# Altium PCB Board.PcbDoc
Units mil, origin at the board's own origin, x right, y up, seen from the top; angles counter-clockwise.
Board outline 6000 x 4000 mil, 2 copper layers (Top Layer, Bottom Layer); 40 components, 18 nets, 177 pads, 0 vias.
Unrouted connection lines stored in the file: 88.
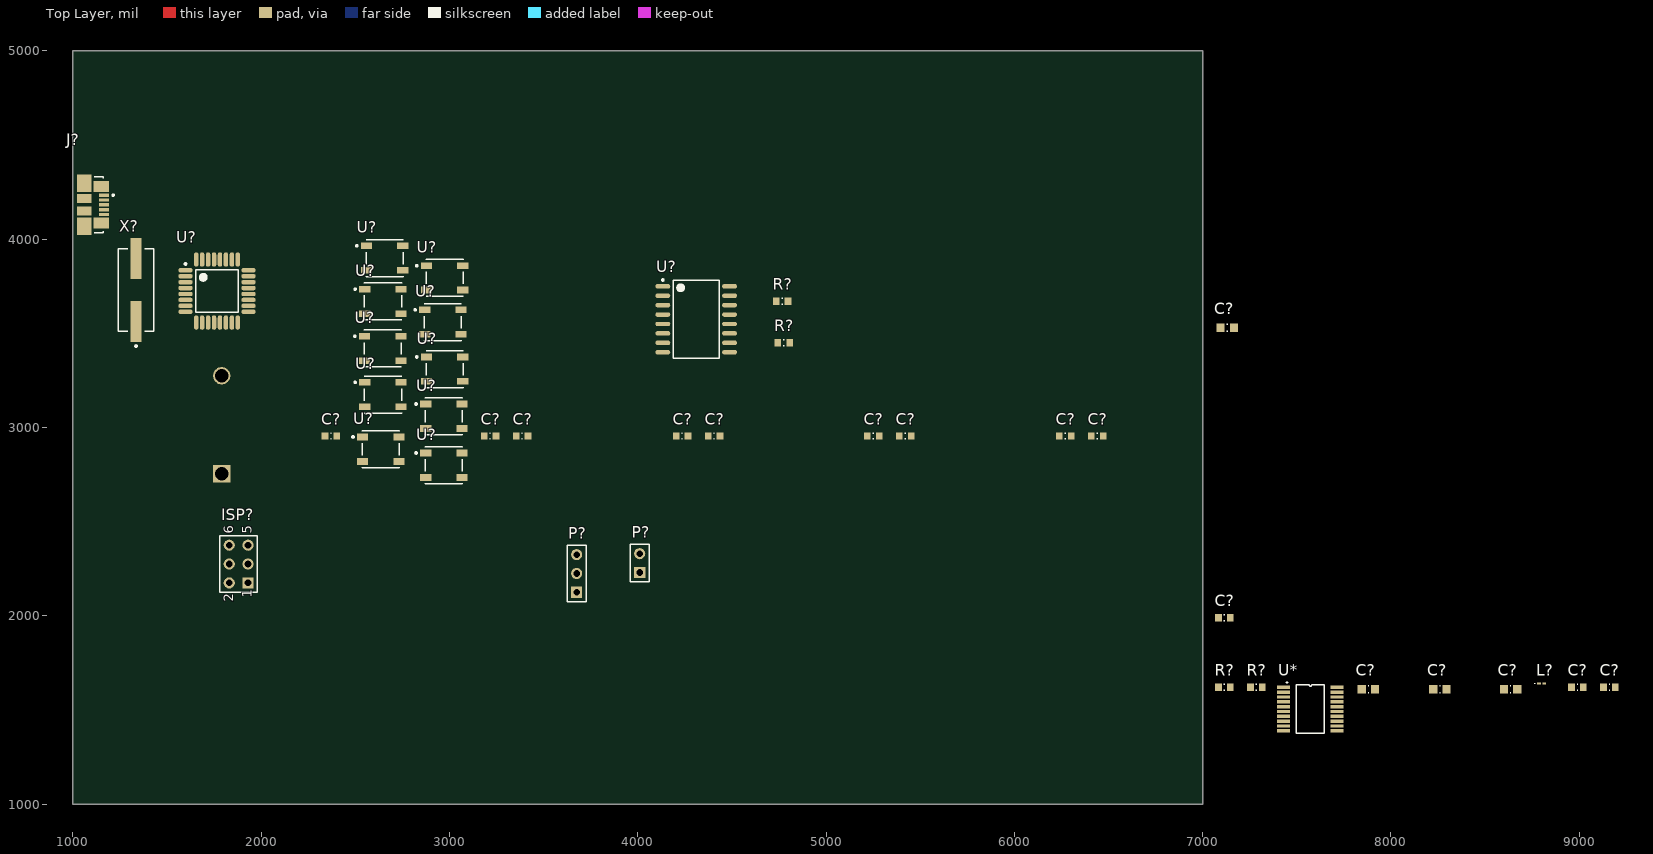
[diagram p0: Top Layer view]
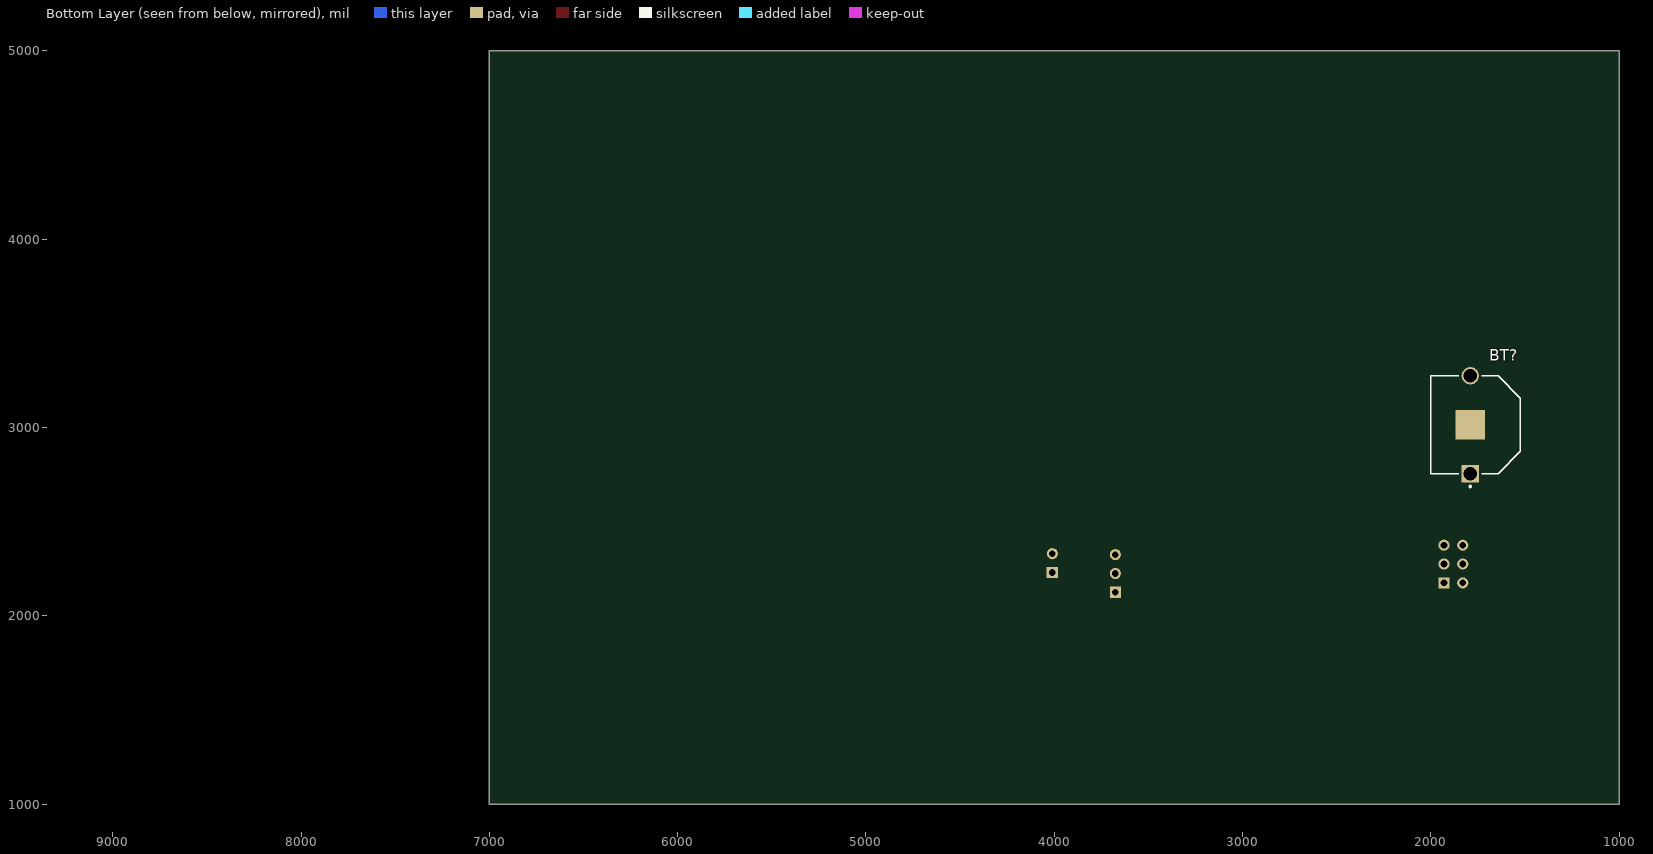
[diagram p1: Bottom Layer view, seen from below]

## Layer stack, top to bottom
Top Solder: solder mask 0.4, Solder Resist, Dk 3.5
Top Layer: signal copper 1.4
Dielectric 1: dielectric 12.6, FR-4, Dk 4.8
Bottom Layer: signal copper 1.4
Bottom Solder: solder mask 0.4, Solder Resist, Dk 3.5

## Board outline
1000,1000 7000,1000 7000,5000 1000,5000

## Design rules (kind name [scope] priority, off if disabled: settings)
Clearance [All] p1: gap=10 ignorepadtopadclearanceinfootprint=FALSE except(0: Arc-Hole Track-Hole SMDPad-Hole THPad-Hole Via-Hole Fill-Hole Poly-Hole Region-Hole Text-Hole)
PolygonConnect [All] p1: connectstyle=Relief reliefconductorwidth=10 reliefentries=4 polygonreliefangle="90 Angle" airgapwidth=10
RoomDefinition USB [InComponentClass('USB')] p1: confinementstyle=ConfineIn formatcopy=TRUE lockcomponents=FALSE outline 0,0 2000,0 2000,1000 0,1000
RoomDefinition RTC [InComponentClass('RTC')] p2: confinementstyle=ConfineIn formatcopy=TRUE lockcomponents=FALSE outline 7045,1060 7545,1060 7545,1825 7045,1825
RoomDefinition LEDs [InComponentClass('LEDs')] p3: confinementstyle=ConfineIn formatcopy=TRUE lockcomponents=FALSE outline 0,0 2000,0 2000,1000 0,1000
RoomDefinition Control [InComponentClass('Control')] p4: confinementstyle=ConfineIn formatcopy=TRUE lockcomponents=FALSE outline 0,0 2000,0 2000,1000 0,1000
RoutingVias [All] p1: holewidth=28 width=50 viastyle="Through Hole" minholewidth=28 minwidth=50 maxholewidth=28 maxwidth=50
SolderMaskExpansion [All] p1: expansion=4
Width [All] p1: maxlimit=10 minlimit=10 preferedwidth=10
30 further rules are at their usual default settings.

## Classes and differential pairs
component class USB: J?
component class RTC: C? R? U?
component class LEDs: C? U?
component class Control: C? ISP? L? P? R? U* U? X?

## Components (designator, comment, footprint, x,y, rotation, side; value= is the part's Value field where it differs from the comment)
BT? "3001" KSTN-3001_V 1790,3015 r90 bottom
C? "CAP 100nF" CAPC0603(1608)100_M 7880,1610 r0 top value=100nF
C? "CAP 22pF 16V" CAPC0603(1608)100_N 9160,1620 r0 top value=22pF
C? "100nF" CAPC0603(1608)100_M 8260,1610 r0 top
C? "100nF" CAPC0603(1608)100_M 8635,1610 r0 top
C? "CAP 22pF 16V" CAPC0603(1608)100_N 8990,1620 r0 top value=22pF
C? "100nF 16V" CAPC0603(1608)100_N 5250,2955 r0 top value=100nF
C? "100nF 16V" CAPC0603(1608)100_N 3215,2955 r0 top value=100nF
C? "100nF 16V" CAPC0603(1608)100_N 4235,2955 r0 top value=100nF
C? "100nF 16V" CAPC0603(1608)100_N 6270,2955 r0 top value=100nF
C? "100nF 16V" CAPC0603(1608)100_N 6440,2955 r0 top value=100nF
C? "100nF 16V" CAPC0603(1608)100_N 3385,2955 r0 top value=100nF
C? "100nF 16V" CAPC0603(1608)100_N 7115,1990 r0 top value=100nF
C? "100nF 16V" CAPC0603(1608)100_N 4405,2955 r0 top value=100nF
C? "100nF 16V" CAPC0603(1608)100_N 2370,2955 r0 top value=100nF
C? "100nF 16V" CAPC0603(1608)100_N 5420,2955 r0 top value=100nF
C? "100nF" CAPC0603(1608)100_M 7130,3530 r0 top
ISP? "Header 3X2" HDR2X3 1930,2175 r90 top
J? "47346-0001" MOLX-47346-0001-5_V 1067.87,4182.97 r270 top
L? "Inductor" 0603 8800,1640 r0 top value=10µH
P? "Header 3" HDR1X3 3675,2125 r90 top
P? "UARTCON" HDR1X2 4010,2230 r90 top
R? "4K7 5% 0603(1608)" RESC0603(1608)_N 7285,1620 r0 top value="4700.00 Ohm"
R? "4K7 5% 0603(1608)" RESC0603(1608)_N 7115,1620 r0 top value="4700.00 Ohm"
R? "4K7" RESC0603(1608)_N 4766.5,3670 r0 top value="4700.00 Ohm"
R? "4K7" RESC0603(1608)_N 4775,3450 r0 top value="4700.00 Ohm"
U* "MTCH108" "MTCH-108 SSOP" 7430,1620 r0 top
U? "ATmega328P-AU" 32A_M 1765,3725 r0 top
U? "1655" ADA-RGB-1655_V 2970,2800 r0 top
U? "1655" ADA-RGB-1655_V 2635,2885 r0 top
U? "1655" ADA-RGB-1655_V 2965,3560 r0 top
U? "1655" ADA-RGB-1655_V 2973.54,3795.04 r0 top
U? "1655" ADA-RGB-1655_V 2646.46,3175.04 r0 top
U? "1655" ADA-RGB-1655_V 2970,3060.04 r0 top
U? "1655" ADA-RGB-1655_V 2646.46,3669.96 r0 top
U? "1655" ADA-RGB-1655_V 2645,3420 r0 top
U? "1655" ADA-RGB-1655_V 2655,3900 r0 top
U? "1655" ADA-RGB-1655_V 2973.54,3310.04 r0 top
U? "DS3231SN" W16-H2_L 4310,3575 r0 top
X? "ATS16ASM-1" CTS-ATS-SM-XTAL-2 1335,3730 r90 top

## Footprints (in the part's own frame and the unit in brackets; to place one, negate y for a bottom-side part, rotate by r counter-clockwise, add the part's x,y. Pads: shape width x height; smd on the part's side, far side on the other; paste and mask are expansions set on the pad)
32A_M [mm] "Thin QFP, 32-Leads, Body 7x7mm, Pitch 0.8mm, IPC Low Density"
  oval 1.95x0.6 smd: 1(-4.25,2.8) 2(-4.25,2) 3(-4.25,1.2) 4(-4.25,0.4) 5(-4.25,-0.4) 6(-4.25,-1.2) 7(-4.25,-2) 8(-4.25,-2.8) 17(4.25,-2.8) 18(4.25,-2) 19(4.25,-1.2) 20(4.25,-0.4) 21(4.25,0.4) 22(4.25,1.2) 23(4.25,2) 24(4.25,2.8)
  oval 0.6x1.95 smd: 9(-2.8,-4.25) 10(-2,-4.25) 11(-1.2,-4.25) 12(-0.4,-4.25) 13(0.4,-4.25) 14(1.2,-4.25) 15(2,-4.25) 16(2.8,-4.25) 25(2.8,4.25) 26(2,4.25) 27(1.2,4.25) 28(0.4,4.25) 29(-0.4,4.25) 30(-1.2,4.25) 31(-2,4.25) 32(-2.8,4.25)
  silkscreen extent -4.37,-2.85 2.85,3.77, body extent -3.5,-3.5 3.5,3.5, height 1.2
0603 [mm] "Chip Inductor, Body 0.6x0.3mm, IPC High Density"
  rect 0.5x0.3 smd: 1(-0.35,0) 2(0.35,0)
  silkscreen extent -0.9,-0.05 -0.9,0.05, body extent -0.33,-0.18 0.33,0.18, height 0.55
ADA-RGB-1655_V [mm] "SMD, 4-Leads, Body 5x5mm"
  rect 1.5x0.9 smd: 1(-2.45,1.65) 2(-2.45,-1.65) 3(2.45,-1.65) 4(2.45,1.65)
  silkscreen extent -3.87,-2.5 2.5,2.5, body extent -2.7,-2.5 2.7,2.5, height 1.68
CAPC0603(1608)100_M [mm] "Chip Capacitor, Body 1.6x0.8mm, Height 1.0mm, IPC Low Density"
  rect 1.1x1.1 smd: 1(-0.9,0) 2(0.9,0)
  silkscreen extent -0.05,-0.45 0.05,0.45, body extent -0.87,-0.47 0.88,0.48, height 1
CAPC0603(1608)100_N [mm] "Chip Capacitor, Body 1.6x0.8mm, Height 1.0mm, IPC Medium Density"
  rect 0.9x1 smd: 1(-0.8,0) 2(0.8,0)
  silkscreen extent -0.05,-0.4 0.05,0.4, body extent -0.87,-0.48 0.88,0.47, height 1
CTS-ATS-SM-XTAL-2 [mm] "SMD, 2-Leads, Body 11.1x4.83mm, Pitch 8.5mm"
  rect 5.5x1.5 smd: 1(-4.25,0) 2(4.25,0)
  silkscreen extent -7.67,-2.41 5.55,2.41, body extent -5.59,-2.42 5.59,2.42, height 4.3
HDR1X2 [mm] "Connector; Header; 2 Position"
  rect 1.5x1.5 hole 0.9: 1(0,0)
  round 1.5 hole 0.9: 2(2.54,0)
  silkscreen extent -1.27,-1.27 3.81,1.27
HDR1X3 [mm] "Connector; Header; 3 Position"
  rect 1.5x1.5 hole 0.9: 1(0,0)
  round 1.5 hole 0.9: 2(2.54,0) 3(5.08,0)
  silkscreen extent -1.27,-1.27 6.35,1.27
HDR2X3 [mm] "Connector; Header; 3x2 Position"
  rect 1.5x1.5 hole 0.9: 1(0,0)
  round 1.5 hole 0.9: 2(0,2.54) 3(2.54,0) 4(2.54,2.54) 5(5.08,0) 6(5.08,2.54)
  silkscreen extent -1.27,-1.27 6.35,3.81
KSTN-3001_V [mm] "THD, 2-Leads, Body 13.21x12.07mm"
  rect 2.35x2.35 hole 1.85: 1(-6.605,0)
  round 2.35 hole 1.85: 2(6.605,0)
  rect 3.96x3.96 smd: 3(0,0)
  silkscreen extent -8.45,-6.73 6.61,5.34, body extent -6.61,-6.73 6.61,5.34, height 3
MOLX-47346-0001-5_V [mm] "SMD, 5-Leads, Body 7.5x5mm, Pitch 0.65mm"
  rect 0.45x1.38 smd: 1(-1.3,2.46) 2(-0.65,2.46) 3(0,2.46) 4(0.65,2.46) 5(1.3,2.46)
  rect 1.475x2.1 smd: 6(-2.462,2.1) 7(2.462,2.1)
  rect 2.375x1.9 smd: 8(-2.913,-0.2) 11(2.913,-0.2)
  rect 1.175x1.9 smd: 9(-0.837,-0.2) 10(0.837,-0.2)
  silkscreen extent -3.75,1.16 3.75,3.83, body extent -3.99,-2.78 3.99,2.65, height 2.69
"MTCH-108 SSOP" [mm]
  rect 1.75x0.45 smd: 1(0,0) 2(0,-0.65) 3(0,-1.3) 4(0,-1.95) 5(0,-2.6) 6(0,-3.25) 7(0,-3.9) 8(0,-4.55) 9(0,-5.2) 10(0,-5.85) 11(7.2,-5.85) 12(7.2,-5.2) 13(7.2,-4.55) 14(7.2,-3.9) 15(7.2,-3.25) 16(7.2,-2.6) 17(7.2,-1.95) 18(7.2,-1.3) 19(7.2,-0.65) 20(7.2,0)
  silkscreen extent 0.38,-6.18 5.49,0.64, body extent 0.96,-6.52 6.26,0.68, height 2
RESC0603(1608)_N [mm] "Chip Resistor, Body 1.6x0.8mm, IPC Medium Density"
  rect 0.9x1 smd: 1(-0.8,0) 2(0.8,0)
  silkscreen extent -0.05,-0.4 0.05,0.4, body extent -0.85,-0.47 0.85,0.47, height 0.6
W16-H2_L [mm] "SOIC, 16-Leads, Body 10.3x7.5mm, Pitch 1.27mm, IPC High Density"
  oval 2x0.6 smd: 1(-4.5,4.445) 2(-4.5,3.175) 3(-4.5,1.905) 4(-4.5,0.635) 5(-4.5,-0.635) 6(-4.5,-1.905) 7(-4.5,-3.175) 8(-4.5,-4.445) 9(4.5,-4.445) 10(4.5,-3.175) 11(4.5,-1.905) 12(4.5,-0.635) 13(4.5,0.635) 14(4.5,1.905) 15(4.5,3.175) 16(4.5,4.445)
  silkscreen extent -4.62,-5.25 3.1,5.42, body extent -3.8,-5.25 3.8,5.25, height 2.65

## Part data
BT?: library part CMP-2000-05463-1, "Holder Battery Coin, 12 mm, 2-Pin THD, RoHS", Manufacturer=Keystone, Package Description="2-Pin Through Hole Device, Body 13.21 x 12.07 mm", Datasheet URL=https://datasheet.ciiva.com/3/3001-3954.pdf, Datasheet Version="Rev. H, 09/2006", Manufacturer URL=http://www.keyelco.com/, Mounting Technology=ThroughHole, Package Reference=3001
C? C? C? C?: library part CMP-1035-02583-1, "CAP 100nF 16V ±5% 0603 (1608 Metric) Thickness 1mm SMD", Case-EIA=0603, Case-Metric=1608, Rated Voltage="16 V", Tolerance=±5%, Max Thickness="1 mm", Technology=SMT
C? C?: library part CMP-1035-00808-1, "CAP 22pF 16V ±5% 0603 (1608 Metric) Thickness 1mm SMD", Case-EIA=0603, Case-Metric=1608, Rated Voltage="16 V", Tolerance=±5%, Max Thickness="1 mm", Technology=SMT
C? C? C? C? C? C? C? C? C? C?: library part CMP-1035-02584-1, "CAP 100nF 16V ±10% 0603 (1608 Metric) Thickness 1mm SMD", Case-EIA=0603, Case-Metric=1608, Rated Voltage="16 V", Tolerance=±10%, Max Thickness="1 mm", Technology=SMT
ISP?: "Header, 3-Pin, Dual row", LatestRevisionDate=17-Jul-2002, LatestRevisionNote="Re-released for DXP Platform.", Publisher="Altium Limited"
J?: library part CMP-2000-05246-1, "Micro-USB B Receptacle with Flange, -30 to 85 degC, 5-Pin SMD, RoHS, Tape and Reel", Color=Black, Manufacturer=Molex, Maximum Current Rating=1.8/ContactA, Maximum Voltage Rating=30VAC, Operating Temperature=-30to85C, Body Orientation=RightAngle, Contact Material=CopperAlloy, Contact Plating=GoldOverPalladiumNickelOverNickel, Datasheet URL=https://datasheet.ciiva.com/30075/304740473460001-io-nectors-30075527.pdf, Datasheet Version=Dec-13, Dimension=7.8x5.43x2.94mm, Gender=RCP, Housing Material=LiquidCrystalPolymer, Manufacturer URL=http://www.molex.com/, Mounting=SurfaceMount, Number of Contacts=5, Number of Ports=1, Number of Terminals=5, Packaging=EmbossedTapeandReel, Part No=47346-0001, Pitch=0.65mm, RoHS=Yes, Termination Method=Solder, Type=MicroUSBTypeB
P?: "Header, 3-Pin", LatestRevisionDate=17-Jul-2002, LatestRevisionNote="Re-released for DXP Platform.", Publisher="Altium Limited"
P?: library part "Header 2", "Header, 2-Pin", LatestRevisionDate=17-Jul-2002, LatestRevisionNote="Re-released for DXP Platform.", Publisher="Altium Limited"
R? R? R? R?: library part CMP-1012-00090-1, "4K7 0.1W 5% 0603 (1608 Metric)  SMD", Case-EIA=0603, Case-Metric=1608, Power="0.1 W", Tolerance="5 %", Technology=SMT
U?: library part CMP-0095-00269-2, "8-bit AVR Microcontroller, 32KB Flash, 1KB EEPROM, 2KB SRAM, 32-pin TQFP, Industrial Grade (-40°C to 85°C)", Code_JEDEC=MS-026-ABA, ComponentLink1Description="Manufacturer URL", ComponentLink1URL=http://www.atmel.com/, ComponentLink2Description="ATmega48A/48PA/88A/88PA/168A/168PA/328/328P Datasheet", ComponentLink2URL=http://www.atmel.com/dyn/resources/prod_documents/doc8271.pdf, ComponentLink3Description="ATmega48A/48PA/88A/88PA/168A/168PA/328/328P Summary", ComponentLink3URL=http://www.atmel.com/dyn/resources/prod_documents/8271S.pdf, DatasheetVersion="revD, May-2011", PackageDescription="32-Lead, 7x7x1.0 mm Body, 0.8mm Lead Pitch, Thin Profile Plastic Quad Flat Package (TQFP)", PackageReference=32A, PackageVersion="revC, Oct-2010", RevisionNote="DatasheetVersion & PackageVersion updated. URLs added."
U? U? U? U? U? U? U? U? U? U?: library part CMP-2000-05026-1, "Intelligent Control LED Integrated Light Source, 3.5 to 5.3 V, -25 to 80 degC, 4-Pin SMD, RoHS, Tape and Reel", Color=Red,Green,Blue(RGB), Manufacturer=Adafruit-Industries-LLC, Package Description="4-Pin Surface Mount Device, Body 5 x 5 mm", Category=Optoelectronics, Configuration=Discrete, Controller Type=-, Datasheet URL=http://datasheet.octopart.com/ADA1655-Adafruit-Industries-datasheet-32028139.pdf, Datasheet Version=May-13, Family=Addressable,Specialty, Interface=-, Manufacturer URL=https://www.adafruit.com/, Mounting Type=SurfaceMount, Number of LEDs=10, Package Reference=1655, Series=Neopixel, Size / Dimension=5.00mmLx5.00mmW, Utilized LED=WS2812(5050)
U?: library part CMP-0254-00293-1, "Extremely Accurate I2C-Integrated Real-Time Clock/TCXO/Crystal, 16-Pin SO, -40 to 85 degC", Code_IPC=SOIC127P1030-16, Code_JEDEC=MS-013-AA, ComponentLink1Description="Manufacturer URL", ComponentLink1URL=http://www.maxim-ic.com, ComponentLink2Description=Datasheet, ComponentLink2URL=http://datasheets.maxim-ic.com/en/ds/DS3231.pdf, ComponentLink3Description="Package Specification", ComponentLink3URL=http://pdfserv.maxim-ic.com/package_dwgs/21-0042.PDF, DatasheetVersion="Rev 8, Jul-2010", PackageDescription="16-Pin Small-Outline IC, Wide (0.3in), 1.27 mm Pitch, SOIC (W)", PackageReference=W16-H2, PackageVersion="revD, 2010"
X?: library part CMP-0585-00002-2, "ATS-SM Series Quartz Crystal, 16 MHz, -20 to 70 degC, 11.1 x 4.83 x 4.3mm SMD, RoHS, Tape and Reel", Frequency="16 MHz", Manufacturer="CTS Corporation", Operating Temperature="-20 to 70 degC", Shunt Capacitance (C0)="7.0 pF Max", ComponentLink1Description="Manufacturer URL", ComponentLink1URL=http://www.ctscorp.com/, ComponentLink2Description=Datasheet, ComponentLink2URL=http://www.ctscorp.com/components/Datasheets/008-0309-0.pdf, ComponentLink3Description="Package Specification", ComponentLink3URL=http://www.ctscorp.com/components/Datasheets/008-0309-0.pdf, Crystal Cut=AT-Cut, DatasheetVersion="Rev. K", Drive Level (Type)="100 uW", ESR Maximum="40 Ohms", Mounting Technology="Surface Mount", Oscillation Mode="Fundamental or 3rd Overtone", PackageDescription="2-Pin SMD, Body 11.1 x 4.83 mm, Pitch 8.5 mm", PackageReference=ATS-SM-XTAL-2, Packing="Tape and Reel", PartNumber=ATS16ASM-1, RoHS=TRUE
L?: Code_IEC=1005, Code_JEITA=0402, LatestRevisionDate=29-May-2009, LatestRevisionNote="IPC-7351 Footprint Added.", PackageDescription="Chip Inductor", PackageReference=0402-A, Published=8-Jun-2000, Publisher="Altium Limited"
U*: ComponentLink1Description=Datasheet, ComponentLink1URL=http://ww1.microchip.com/downloads/en/DeviceDoc/40001793C.pdf

## Nets (pads, with @x,y where several pads share a name; then routed paths per layer and width w, separated by ;. In a path a pad name is that pad's centre, name@x,y a point inside that pad or via, vN(x,y) a via of type N, cw(c..) or ccw(c..) an arc to the next point about the centre after c; other vN are vias at no path point)
+3V3: C?.2@7915.43,1610 U*.1
+5: C?.2@2401.5,2955 C?.2@3246.5,2955 C?.2@3416.5,2955 C?.2@4266.5,2955 C?.2@4436.5,2955 C?.2@5281.5,2955 C?.2@5451.5,2955 C?.2@6301.5,2955 C?.2@6471.5,2955 C?.2@7146.5,1990 C?.2@7165.43,3530 ISP?.2 L?.2 P?.1@3675,2125 R?.1@4743.5,3450 R?.2@4797.99,3670 U?.1@2538.54,2949.96 U?.1@2548.54,3484.96 U?.1@2550,3240 U?.1@2550,3734.92 U?.1@2558.54,3964.96 U?.1@2868.54,3624.96 U?.1@2873.54,2864.96 U?.1@2873.54,3125 U?.1@2877.09,3375 U?.1@2877.09,3860 U?.2@4132.83,3700 U?.4@1597.68,3740.75 U?.6@1597.68,3677.76
GND: BT?.3 C?.1@2338.5,2955 C?.1@3183.5,2955 C?.1@3353.5,2955 C?.1@4203.5,2955 C?.1@4373.5,2955 C?.1@5218.5,2955 C?.1@5388.5,2955 C?.1@6238.5,2955 C?.1@6408.5,2955 C?.1@7083.5,1990 C?.1@7094.57,3530 C?.1@7844.57,1610 C?.1@8224.57,1610 C?.1@8599.57,1610 C?.1@8958.5,1620 C?.2@9191.5,1620 ISP?.6 J?.5 J?.6 J?.7 J?.8 J?.9 J?.10 J?.11 P?.3 U*.20 U?.3@1597.68,3772.24 U?.3@2731.46,2820.04 U?.3@2741.46,3355.04 U?.3@2742.91,3110.08 U?.3@2742.91,3605 U?.3@2751.46,3835.04 U?.3@3061.46,3495.04 U?.3@3066.46,2735.04 U?.3@3066.46,2995.08 U?.3@3070,3245.08 U?.3@3070,3730.08 U?.5@1597.68,3709.25 U?.13@4487.17,3600 U?.21
MCU_MISO: ISP?.1 U?.16@1875.24,3557.68
MCU_MOSI: ISP?.4 U?.15@1843.74,3557.68
MCU_RESET: ISP?.5 U?.29
MCU_RX: P?.2@4010,2330 U?.30
MCU_SCK: ISP?.3 U?.17
MCU_TX: P?.1@4010,2230 U?.31
NetBT?_1: BT?.1 U?.14@4487.17,3650
NetC?_2: C?.2@8295.43,1610 L?.1 U?.18
NetR?_2: R?.2@7316.5,1620 U*.2
NetU?_2: U?.2@2873.54,2995.08 U?.4@2731.46,2949.96
PIXELS: U?.4@2742.91,3734.92
SCL: R?.2@4806.5,3450 U?.16@4487.17,3750 U?.28
SDA: R?.1@4735,3670 U?.15@4487.17,3700 U?.27
X1_16MHz: C?.2@9021.5,1620 U?.7@1597.68,3646.26 X?.1
X2_16MHz: C?.1@9128.5,1620 U?.8@1597.68,3614.76 X?.2
pads on no net: BT?.2 C?.2@8670.43,1610 J?.1 J?.2 J?.3 J?.4 P?.2@3675,2225 R?.1@7083.5,1620 R?.1@7253.5,1620 R?.2@7146.5,1620 U*.3 U*.4 U*.5 U*.6 U*.7 U*.8 U*.9 U*.10 U*.11 U*.12 U*.13 U*.14 U*.15 U*.16 U*.17 U*.18 U*.19 U?.1@1597.68,3835.24 U?.1@4132.83,3750 U?.2@1597.68,3803.74 U?.2@2538.54,2820.04 U?.2@2548.54,3355.04 U?.2@2550,3110.08 U?.2@2550,3605 U?.2@2558.54,3835.04 U?.2@2868.54,3495.04 U?.2@2873.54,2735.04 U?.2@2877.09,3245.08 U?.2@2877.09,3730.08 U?.3@4132.83,3650 U?.4@2741.46,3484.96 U?.4@2742.91,3240 U?.4@2751.46,3964.96 U?.4@3061.46,3624.96 U?.4@3066.46,2864.96 U?.4@3066.46,3125 U?.4@3070,3375 U?.4@3070,3860 U?.4@4132.83,3600 U?.5@4132.83,3550 U?.6@4132.83,3500 U?.7@4132.83,3450 U?.8@4132.83,3400 U?.9 U?.10 U?.11 U?.12 U?.13@1780.75,3557.68 U?.14@1812.24,3557.68 U?.19 U?.20 U?.22 U?.23 U?.24 U?.25 U?.26 U?.32

## Dimensions
9770,3655 to 9720,2270 on Top Layer

## Text inside footprints (layer, text, board x,y; h text height)
ISP?: Top Overlay "6" at 1850,2435 h50 r90; Top Overlay "5" at 1950,2435 h50 r90; Top Overlay "2" at 1850,2075 h50 r90; Top Overlay "1" at 1950,2095 h50 r90
J?: Mechanical 6 "PCB EDGE" at 998.7,4466.44 h11.81 r270